# EAGLE board power_dual (EAGLE 7.2.0)
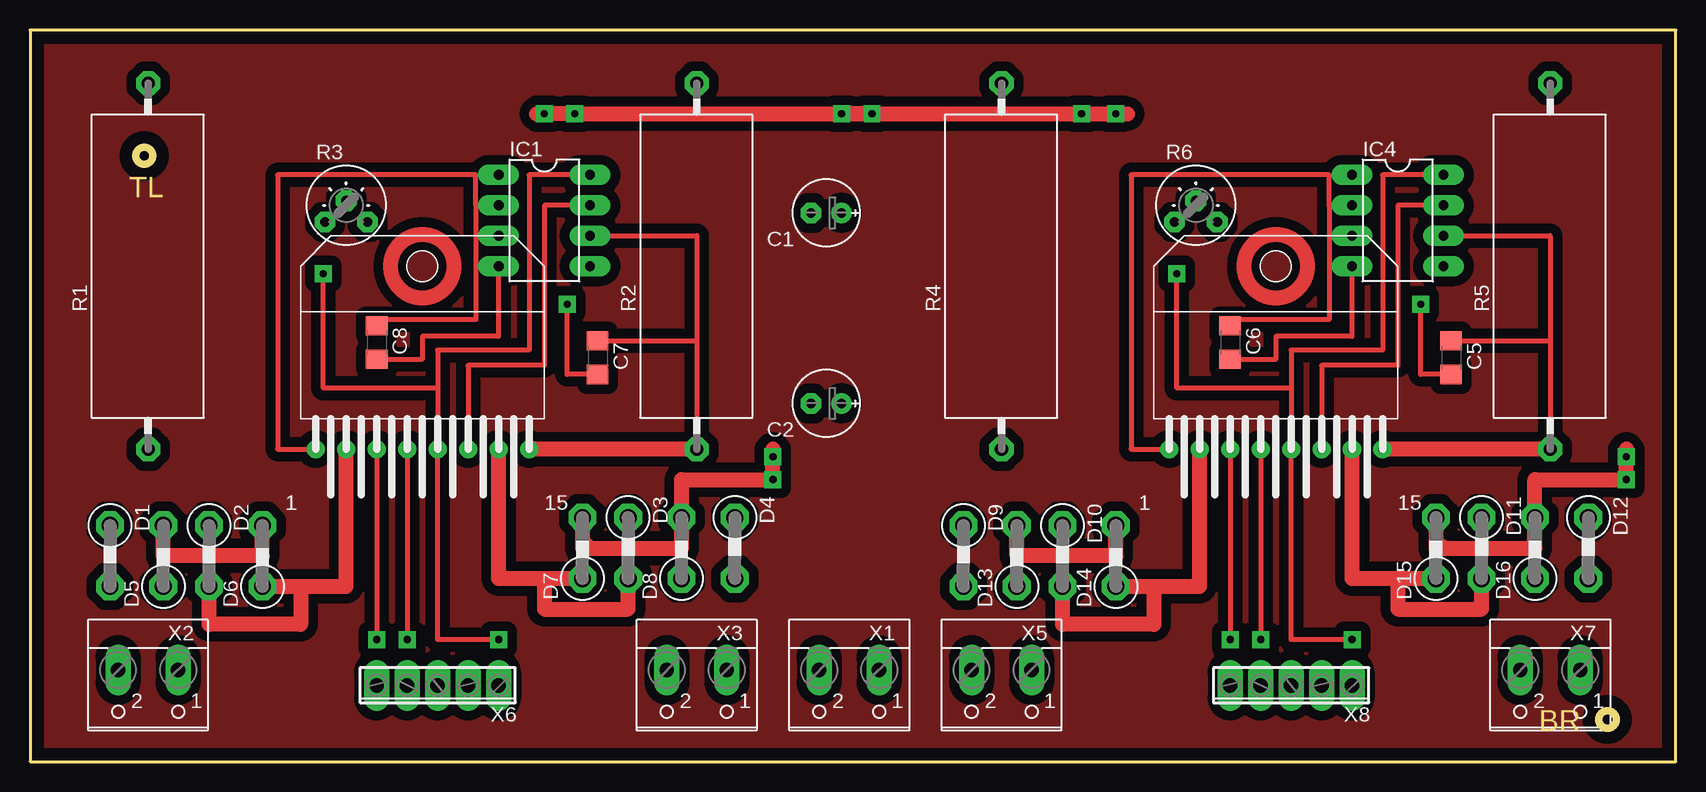
[diagram p0: board, top side]
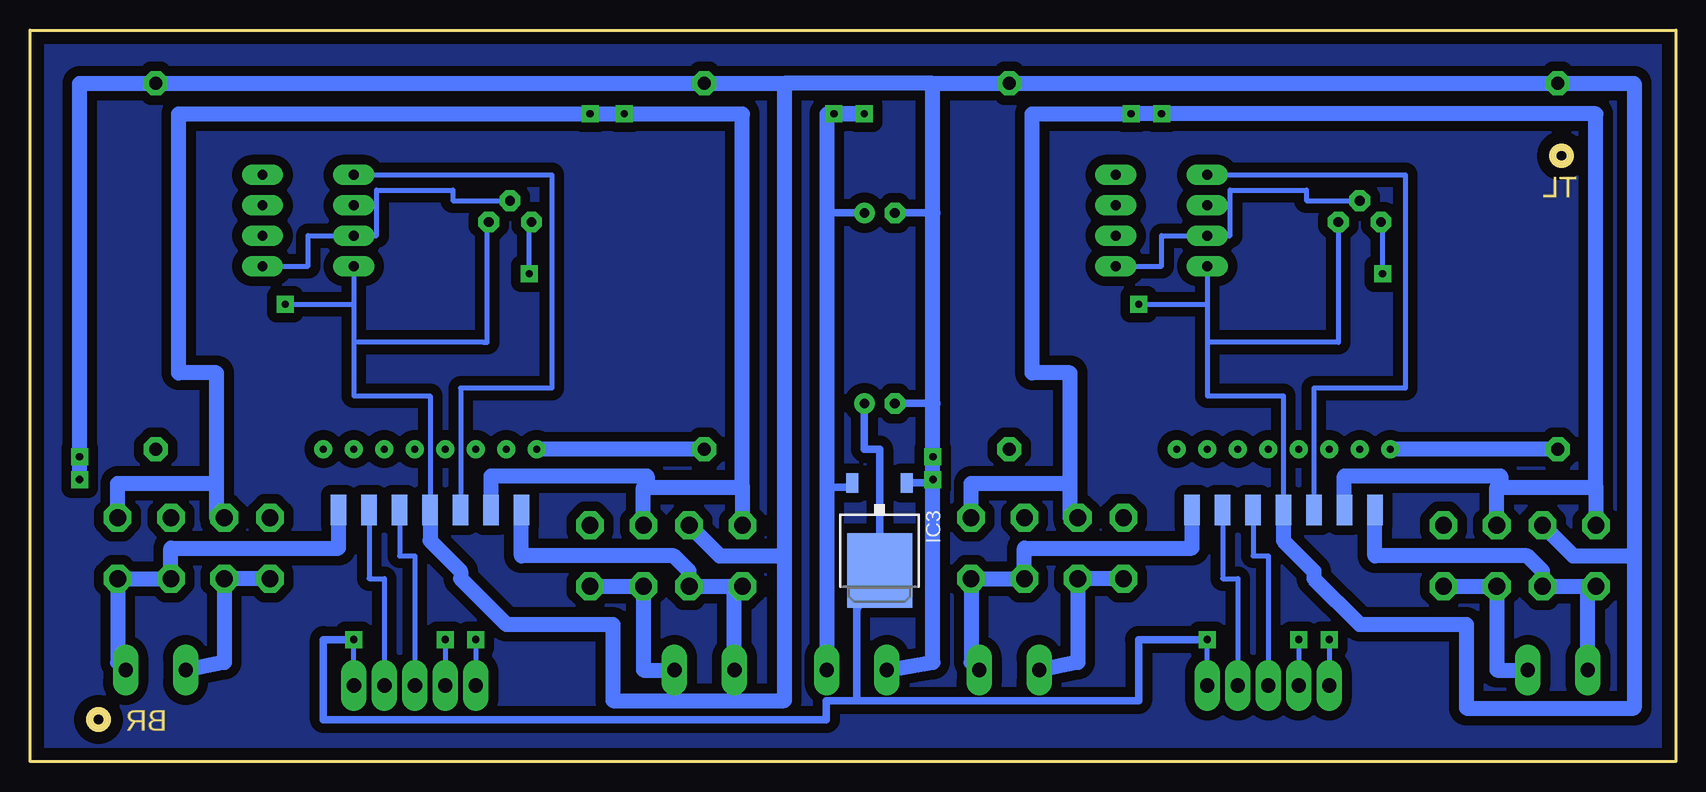
[diagram p1: board, bottom side, seen from below]

Size 137.16 x 60.96 mm. Coordinates in mm from the lower left corner, seen from the top.
Outline: 0,0 137.16,0 137.16,60.96 0,60.96 0,0
Outline: circle at 9.53,50.48 radius 0.71
Outline: circle at 131.44,3.49 radius 0.71
Copper layers (1*16): Top 0.035mm / dielectric 1.5mm / Bottom 0.035mm
Design rules "default *": minimum track width 15mil, minimum drill 24mil, track to track 8mil, track to pad 8mil, pad to pad 8mil, via to via 8mil, smd to smd 8mil, copper to edge 40mil, drill to drill 8mil, minimum pad ring 18mil, minimum via ring 16mil, stop-mask expansion 4mil, vias tented up to drill 0mil, thermal gap 10mil

## Footprints (pad centres in the part's own frame; a part is rotated, then mirrored left to right if it is on the bottom)
E2,5-6E = drill 0.813 pad 1.575: + -1.27,0 | drill 0.813 pad 1.575 octagon: - 1.27,0
C1206 = smd 1.6 x 1.8: 1 -1.4,0; 2 1.4,0
C1702-05 = drill 1.397 octagon: A 2.54,0; C -2.54,0
DIL08 = drill 0.813 long: 1 -3.81,-3.81; 2 -1.27,-3.81; 3 1.27,-3.81; 4 3.81,-3.81; 5 3.81,3.81; 6 1.27,3.81; 7 -1.27,3.81; 8 -3.81,3.81
DPACK = smd 1 x 1.6: 1 -2.28,-4.8; 3 2.28,-4.8 | smd 5.4 x 6.2: 2 0,2.5
VTA52 = drill 1.1 octagon: 1 -15.24,0; 2 15.24,0
S75H = drill 0.813 octagon: A -1.778,-1.397; E 1.778,-1.397; S 0,0.381
MULTIWATT-15-1 = drill 0.6 pad 1.27: P$1 -15.24,6.35; P$3 -12.7,6.35; P$5 -10.16,6.35; P$7 -7.62,6.35; P$9 -5.08,6.35; P$11 -2.54,6.35; P$13 0,6.35; P$15 2.54,6.35 | smd 1.27 x 2.54 bottom: P$2 -13.97,1.27; P$4 -11.43,1.27; P$6 -8.89,1.27; P$8 -6.35,1.27; P$10 -3.81,1.27; P$12 -1.27,1.27; P$14 1.27,1.27
W237-102 = drill 1.194 long: 1 -2.5,-1.27; 2 2.5,-1.27
5POL254 = drill 1.2 long: 1 -5.08,0; 2 -2.54,0; 3 0,0; 4 2.54,0; 5 5.08,0

## Placement (x,y rotation side)
C1  [E2,5-6E]  66.36,45.72 180 top
C2  [E2,5-6E]  66.36,29.84 180 top
C5  [C1206]  118.43,33.66 270 top
C6  [C1206]  100.01,34.92 270 top
C7  [C1206]  47.31,33.66 270 top
C8  [C1206]  28.89,34.92 270 top
D1  [C1702-05]  6.67,17.14 270 top
D2  [C1702-05]  14.92,17.14 270 top
D3  [C1702-05]  49.85,17.78 270 top
D4  [C1702-05]  58.74,17.78 270 top
D5  [C1702-05]  11.11,17.14 90 top
D6  [C1702-05]  19.37,17.14 90 top
D7  [C1702-05]  46.04,17.78 90 top
D8  [C1702-05]  54.29,17.78 90 top
D9  [C1702-05]  77.79,17.14 270 top
D10  [C1702-05]  86.04,17.14 270 top
D11  [C1702-05]  120.97,17.78 270 top
D12  [C1702-05]  129.86,17.78 270 top
D13  [C1702-05]  82.23,17.14 90 top
D14  [C1702-05]  90.49,17.14 90 top
D15  [C1702-05]  117.16,17.78 90 top
D16  [C1702-05]  125.41,17.78 90 top
IC1  AD712Q  [DIL08]  42.86,45.09 270 top
IC3  MC33269D-3.3  [DPACK]  66.36,18.41 180 bottom
IC4  AD712Q  [DIL08]  113.98,45.09 270 top
R1  [VTA52]  9.84,41.27 90 top
R2  [VTA52]  55.56,41.27 90 top
R3  [S75H]  26.35,46.35 0 top
R4  [VTA52]  80.96,41.27 90 top
R5  [VTA52]  126.68,41.27 90 top
R6  [S75H]  97.16,46.35 0 top
U$1  L298-1  [MULTIWATT-15-1]  110.17,19.68 0 top
U$2  L298-1  [MULTIWATT-15-1]  39.05,19.68 0 top
X1  [W237-102]  68.26,6.35 180 top
X2  [W237-102]  9.84,6.35 180 top
X3  [W237-102]  55.56,6.35 180 top
X5  [W237-102]  80.96,6.35 180 top
X6  [5POL254]  33.97,6.35 180 top
X7  [W237-102]  126.68,6.35 180 top
X8  [5POL254]  105.09,6.35 180 top

## Library data of the parts
C1 C2 C5-C8 = resistor
D1-D16 = diode
IC1 IC4 = analog-devices; MF: ALTERA CORPORATION; MPN: AD712AQ; OC_FARNELL: 9604898; OC_NEWARK: 05F7274
IC3 = linear
R1 R2 R4 R5 = rcl
R3 R6 = pot
U$1 U$2 = st-microelectronics
X1-X3 X5 X7 = con-wago-500; MPN: 237-102; OC_FARNELL: unknown; OC_NEWARK: 70K9898
X6 X8 = con-phoenix-254; OC_FARNELL: unknown; OC_NEWARK: unknown

## Nets
N$1: C1.- C2.- C5.2 C6.2 C7.2 C8.2 D5.A D6.A D7.A D8.A D13.A D14.A D15.A D16.A IC1.4 IC3.1 IC4.4 R1.2 R2.2 R3.E R4.2 R5.2 U$1.P$8 U$2.P$8 X1.2
N$2: D2.A D6.C U$2.P$3 X2.1
N$3: C2.+ IC1.8 IC3.2 IC4.8 R3.A R6.A U$1.P$9 U$2.P$9 X6.1 X8.1
N$4: C8.1 IC1.2 R1.1 U$2.P$1
N$5: C7.1 IC1.6 R2.1 U$2.P$15
N$6: IC1.3 IC1.5 R3.S
N$7: IC1.1 U$2.P$6
N$8: IC1.7 U$2.P$11
N$9: D4.A D8.C U$2.P$14 X3.1
N$11: D3.A D7.C U$2.P$13 X3.2
N$12: D1.A D5.C U$2.P$2 X2.2
N$13: U$2.P$5 X6.5
N$14: U$2.P$7 X6.4
N$15: U$2.P$10 X6.3
N$16: U$2.P$12 X6.2
N$18: C6.1 IC4.2 R4.1 U$1.P$1
N$19: C5.1 IC4.6 R5.1 U$1.P$15
N$20: C1.+ D1.C D2.C D3.C D4.C D9.C D10.C D11.C D12.C IC3.3 U$1.P$4 U$2.P$4 X1.1
N$21: IC4.1 U$1.P$6
N$22: IC4.7 U$1.P$11
N$23: D12.A D16.C U$1.P$14 X7.1
N$24: D11.A D15.C U$1.P$13 X7.2
N$25: D10.A D14.C U$1.P$3 X5.1
N$26: D9.A D13.C U$1.P$2 X5.2
N$27: U$1.P$5 X8.5
N$28: U$1.P$7 X8.4
N$29: U$1.P$10 X8.3
N$30: U$1.P$12 X8.2
N$31: IC4.3 IC4.5 R6.S

## Tracks (layer width: path | path; a pad name or v marks a point on that pad's centre or on a via)
N$1  (via drill 0.6)
  Top 0.406: C8.2 32.7,33.52 32.7,35.43 39.05,35.43 IC1.4 | C7.2 44.77,32.26 v44.77,38.1 | C6.2 103.82,33.52 103.82,35.43 110.17,35.43 IC4.4 | C5.2 115.89,32.26 v115.89,38.1
  Top 1.27: D6.A 19.37,17.14 11.11,17.14 D5.A | 46.67,17.78 46.04,17.78 D7.A 46.04,18.41 46.67,17.78 | 46.67,17.78 54.29,17.78 D8.A 54.29,23.5 v61.91,23.5 v61.91,25.4 61.91,26.04 | D14.A 90.49,17.14 82.23,17.14 D13.A | 117.79,17.78 117.16,17.78 D15.A 117.16,18.41 117.79,17.78 | 117.79,17.78 125.41,17.78 D16.A 125.41,23.5 v133.03,23.5 v133.03,25.4 133.03,26.04
  Bottom 0.406: IC1.4 39.05,38.1 | 39.05,38.1 39.05,34.92 | 39.05,34.92 39.05,30.48 32.7,30.48 U$2.P$8 | v44.77,38.1 39.05,38.1 | R3.E 28.13,34.92 39.05,34.92 | IC4.4 110.17,38.1 | 110.17,38.1 110.17,34.92 | 110.17,34.92 110.17,30.48 103.82,30.48 U$1.P$8 | v115.89,38.1 110.17,38.1 | 110.17,34.92 99.38,34.92 99.25,34.92 99.06,34.92 99.06,45.09
  Bottom 0.61: 61.91,23.21 IC3.1 | C2.- 61.91,29.84 | C1.- 61.91,45.72
  Bottom 1.27: U$2.P$8 32.7,18.41 30.16,15.88 30.16,15.24 26.35,11.43 17.46,11.43 17.46,4.45 3.49,4.45 3.49,17.14 | 3.49,17.14 3.49,56.52 R1.2 R2.2 61.91,56.52 | D5.A 8.57,17.14 3.49,17.14 | X1.2 61.91,8.26 61.91,23.21 v61.91,23.5 v61.91,25.4 61.91,29.84 61.91,45.72 61.91,56.52 | U$1.P$8 103.82,18.41 101.28,15.88 101.28,15.24 97.47,11.43 88.58,11.43 88.58,5.08 74.3,5.08 74.3,17.14 | 74.3,56.52 R4.2 R5.2 133.03,56.52 v133.03,25.4 v133.03,23.5 | 74.3,56.52 74.3,17.14 | D13.A 79.69,17.14 74.3,17.14 | 61.91,56.52 74.3,56.52
  other vias: 54.29,20.32 11.11,19.68 82.23,19.68
N$2
  Top 1.27: D6.C 22.54,14.61 | 22.54,14.61 26.35,14.61 U$2.P$3 | 22.54,14.61 22.54,11.43 14.92,11.43 D2.A
  Bottom 1.27: D6.C D2.A 14.92,7.62 X2.1
N$3  (via drill 0.6)
  Top 0.406: IC1.8 41.59,48.9 41.59,34.29 33.97,34.29 33.97,31.11 | 33.97,31.11 U$2.P$9 33.97,10.16 v39.05,10.16 | 33.97,31.11 24.45,31.11 v24.45,40.64 | IC4.8 112.71,48.9 112.71,34.29 105.09,34.29 105.09,31.11 | 105.09,31.11 U$1.P$9 105.09,10.16 v110.17,10.16 | 105.09,31.11 95.57,31.11 v95.57,40.64
  Bottom 0.406: X6.1 v39.05,10.16 | v24.45,40.64 24.45,44.96 R3.A | X8.1 v110.17,10.16 | v95.57,40.64 95.57,44.96 R6.A
  Bottom 0.61: v39.05,10.16 44.77,10.16 44.77,5.08 68.26,5.08 | 68.26,5.08 68.26,12.7 IC3.2 | 68.26,16.51 IC3.2 | C2.+ 67.63,26.04 66.36,26.04 IC3.2 | 68.26,5.08 70.8,5.08 70.8,3.49 112.71,3.49 112.71,10.16 v110.17,10.16
N$4
  Top 0.406: IC1.2 37.15,46.35 | 37.15,46.35 37.15,48.9 20.64,48.9 20.64,26.04 U$2.P$1 | 37.15,46.35 37.15,36.83 28.89,36.83 C8.1
  Bottom 1.27: R1.1 U$2.P$1
N$5
  Top 0.406: IC1.6 55.56,43.81 55.56,35.05 | 55.56,35.05 R2.1 | C7.1 55.56,35.05
  Top 1.27: R2.1 U$2.P$15
N$6
  Bottom 0.406: IC1.5 42.86,41.27 42.86,43.81 IC1.3 37.15,43.81 37.15,47.62 30.8,47.62 30.8,46.74 R3.S
N$7
  Bottom 0.406: IC1.1 22.54,48.9 22.54,31.11 30.16,31.11 U$2.P$6
N$8
  Top 0.406: IC1.7 42.86,46.35 42.86,33.02 36.51,33.02 U$2.P$11
N$9
  Bottom 1.27: X3.1 58.74,8.26 D4.A D8.C 54.29,17.78 40.32,17.78 U$2.P$14
N$11
  Top 1.27: D7.C 42.86,15.24 | 42.86,15.24 39.05,15.24 U$2.P$13 | 42.86,15.24 42.86,12.7 49.85,12.7 D3.A
  Bottom 1.27: D7.C D3.A 49.85,8.26 X3.2
N$12
  Bottom 1.27: 7.34,14.61 D5.C 11.11,15.88 12.38,17.14 25.08,17.14 U$2.P$2 | 7.34,14.61 D1.A | X2.2 7.34,14.61
N$13  (via drill 0.6)
  Top 0.406: U$2.P$5 v28.89,10.16
  Bottom 0.406: v28.89,10.16 X6.5
N$14  (via drill 0.6)
  Top 0.406: U$2.P$7 v31.43,10.16
  Bottom 0.406: v31.43,10.16 X6.4
N$15
  Bottom 0.406: U$2.P$10 35.24,17.14 33.97,17.14 X6.3
N$16
  Bottom 0.406: U$2.P$12 37.78,15.24 36.51,15.24 X6.2
N$18
  Top 0.406: IC4.2 108.27,46.35 | 108.27,46.35 108.27,48.9 91.76,48.9 91.76,26.04 U$1.P$1 | 108.27,46.35 108.27,36.83 100.01,36.83 C6.1
  Bottom 1.27: R4.1 U$1.P$1
N$19
  Top 0.406: IC4.6 126.68,43.81 126.68,35.05 | 126.68,35.05 R5.1 | C5.1 126.68,35.05
  Top 1.27: R5.1 U$1.P$15
N$20  (via drill 0.6)
  Top 1.27: v67.63,53.98 v70.17,53.98 v45.4,53.98 v42.86,53.98 42.23,53.98 | v67.63,53.98 66.99,53.98 | v67.63,53.98 v87.63,53.98 v90.49,53.98 91.44,53.98
  Bottom 0.61: IC3.3 68.64,22.86 70.76,22.86 | C1.+ 70.76,45.72
  Bottom 1.27: 70.76,8.89 X1.1 70.76,22.86 70.76,45.72 70.76,53.98 v67.63,53.98 v70.17,53.98 | D2.C 14.92,22.86 14.61,22.86 | 14.61,22.86 6.67,22.86 | 6.67,22.86 6.67,53.98 v42.86,53.98 v45.4,53.98 53.66,53.98 53.66,32.38 50.48,32.38 50.48,23.18 | D3.C 50.48,20.32 50.48,23.18 | U$2.P$4 27.62,23.81 14.61,23.81 14.61,22.86 | 6.67,22.86 D1.C | D4.C 58.74,23.18 50.48,23.18 | D10.C 86.04,22.86 85.72,22.86 | 85.72,22.86 77.79,22.86 | 77.79,22.86 77.79,53.98 v87.63,53.98 v90.49,53.98 124.78,53.98 124.78,32.38 121.6,32.38 121.6,23.18 | U$1.P$4 98.74,23.81 85.72,23.81 85.72,22.86 | 77.79,22.86 D9.C | D12.C 129.86,23.18 121.6,23.18 | D11.C 121.6,20.32 121.6,23.18
N$21
  Bottom 0.406: IC4.1 93.66,48.9 93.66,31.11 101.28,31.11 U$1.P$6
N$22
  Top 0.406: IC4.7 113.98,46.35 113.98,33.02 107.63,33.02 U$1.P$11
N$23
  Bottom 1.27: X7.1 129.86,8.26 D12.A D16.C 125.41,17.78 111.44,17.78 U$1.P$14
N$24
  Top 1.27: D15.C 113.98,15.24 | 113.98,15.24 110.17,15.24 U$1.P$13 | 113.98,15.24 113.98,12.7 120.97,12.7 D11.A
  Bottom 1.27: D15.C D11.A 120.97,8.26 X7.2
N$25
  Top 1.27: D14.C 93.66,14.61 | 93.66,14.61 97.47,14.61 U$1.P$3 | 93.66,14.61 93.66,11.43 86.04,11.43 D10.A
  Bottom 1.27: D14.C D10.A 86.04,7.62 X5.1
N$26
  Bottom 1.27: 78.46,14.61 D13.C 82.23,15.88 83.5,17.14 96.2,17.14 U$1.P$2 | 78.46,14.61 D9.A | X5.2 78.46,14.61
N$27  (via drill 0.6)
  Top 0.406: U$1.P$5 v100.01,10.16
  Bottom 0.406: v100.01,10.16 X8.5
N$28  (via drill 0.6)
  Top 0.406: U$1.P$7 v102.55,10.16
  Bottom 0.406: v102.55,10.16 X8.4
N$29
  Bottom 0.406: U$1.P$10 106.36,17.14 105.09,17.14 X8.3
N$30
  Bottom 0.406: U$1.P$12 108.9,15.24 107.63,15.24 X8.2
N$31
  Bottom 0.406: IC4.5 113.98,41.27 113.98,43.81 IC4.3 108.27,43.81 108.27,47.62 101.92,47.62 101.92,46.74 R6.S
S$1
  pour Top (isolate 0.813): 0,0 137.16,0 137.16,60.96 0,60.96
S$2
  pour Bottom (isolate 0.813): 0,0 137.16,0 137.16,60.96 0,60.96
(copper drawn outside any net)
  shapes: Top circle x2

## Text on the board
Dimension: TL | BR